# Altium PCB PCB3.PcbDoc
Units mil, origin at the board's own origin, x right, y up, seen from the top; angles counter-clockwise.
Board outline 6000 x 4000 mil, 2 copper layers (Top Layer, Bottom Layer); 46 components, 39 nets, 182 pads, 0 vias.
Unrouted connection lines stored in the file: 71.
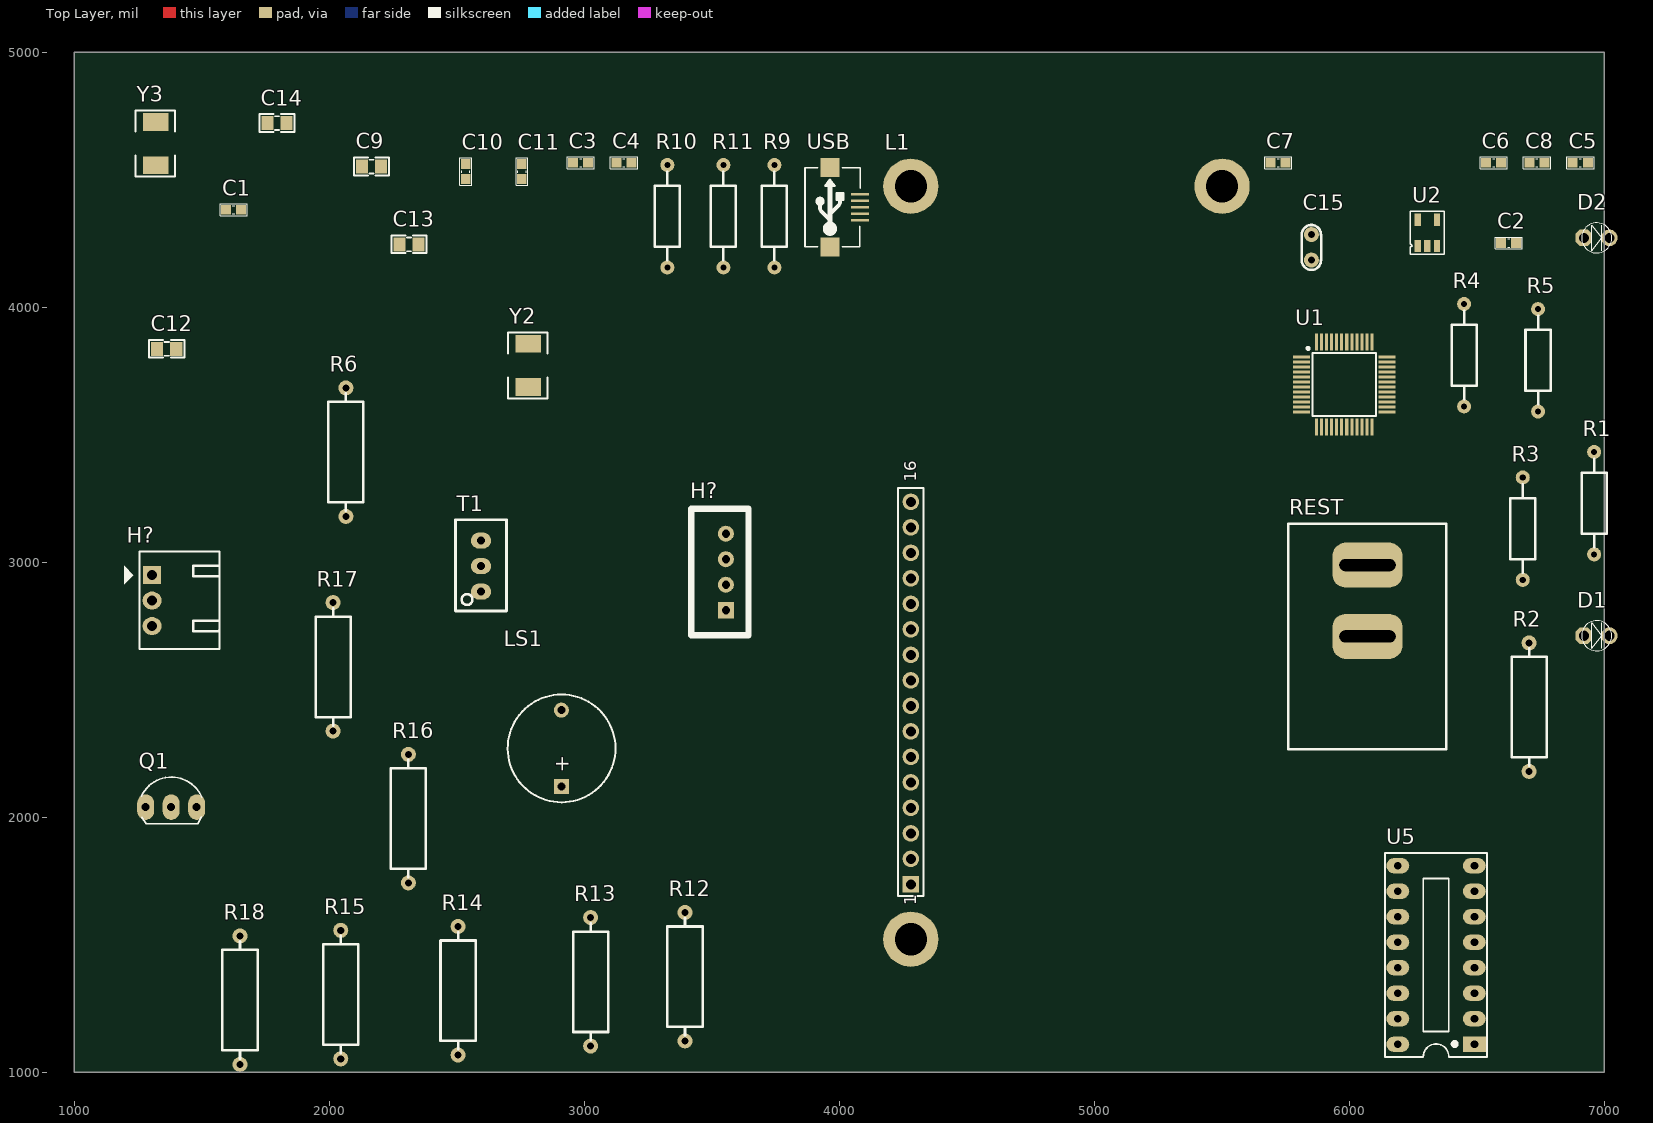
[diagram p0: Top Layer view]
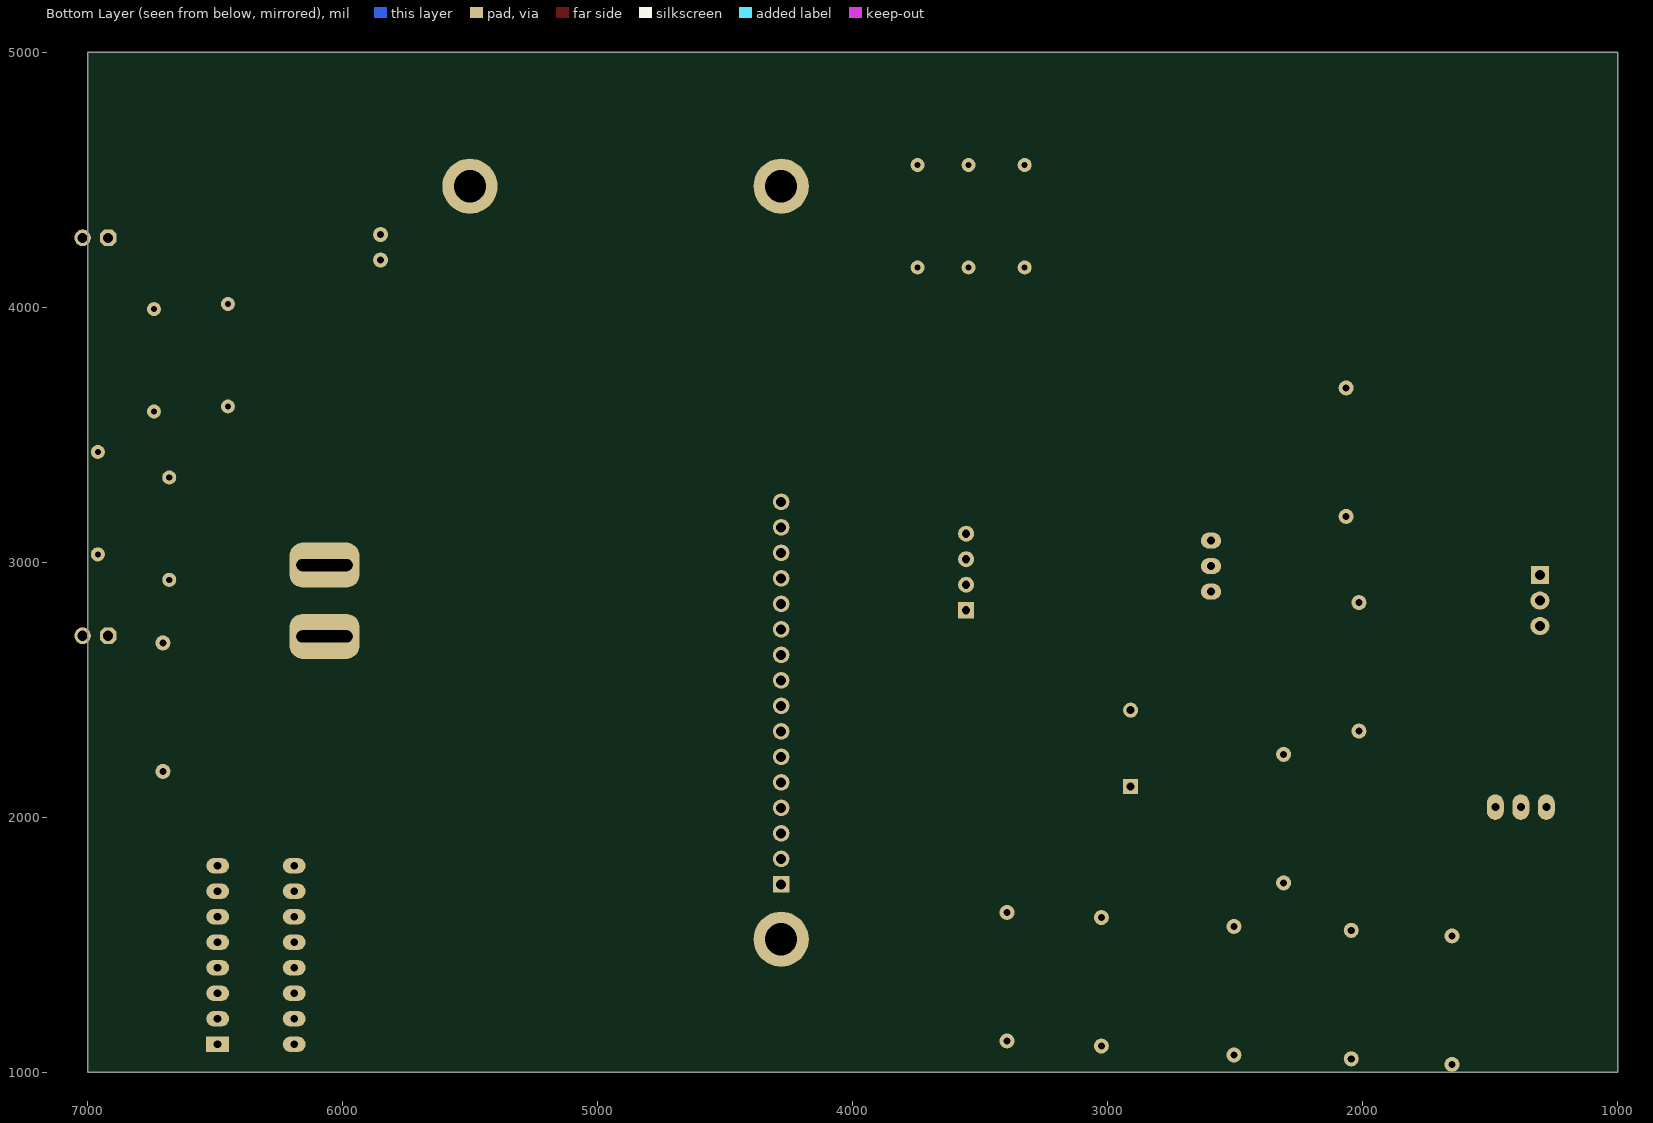
[diagram p1: Bottom Layer view, seen from below]

## Layer stack, top to bottom
Top Solder: solder mask 0.4, Solder Resist, Dk 3.5
Top Layer: signal copper 1.4
Dielectric 1: dielectric 12.6, FR-4, Dk 4.8
Bottom Layer: signal copper 1.4
Bottom Solder: solder mask 0.4, Solder Resist, Dk 3.5

## Board outline
1000,1000 7000,1000 7000,5000 1000,5000

## Design rules (kind name [scope] priority, off if disabled: settings)
Clearance [All] p1: gap=10 ignorepadtopadclearanceinfootprint=FALSE except(0: Arc-Hole Track-Hole SMDPad-Hole THPad-Hole Via-Hole Fill-Hole Poly-Hole Region-Hole Text-Hole)
PolygonConnect [All] p1: connectstyle=Relief reliefconductorwidth=10 reliefentries=4 polygonreliefangle="90 Angle" airgapwidth=10
RoomDefinition Sheet3 [InComponentClass('Sheet3')] p1: confinementstyle=ConfineIn formatcopy=TRUE lockcomponents=FALSE outline 7110,1171.97 10615,1171.97 10615,2091.97 7110,2091.97
RoutingVias [All] p1: holewidth=28 width=50 viastyle="Through Hole" minholewidth=28 minwidth=50 maxholewidth=28 maxwidth=50
SolderMaskExpansion [All] p1: expansion=4 istentingtop=FALSE
Width [All] p1: maxlimit=10 minlimit=10 preferedwidth=10
30 further rules are at their usual default settings.

## Components (designator, comment, footprint, x,y, rotation, side; value= is the part's Value field where it differs from the comment)
C1 "104" "tu 0603" 1624.53,4381.97 r0 top
C2 "105" "tu 0603" 6625,4251.97 r0 top
C3 "104" "tu 0603" 2985.47,4566.97 r0 top
C4 "104" "tu 0603" 3155.47,4566.97 r0 top
C5 "105" "tu 0603" 6905.47,4566.97 r0 top
C6 "106" "tu 0603" 6565.47,4566.97 r0 top
C7 "104" "tu 0603" 5720.47,4566.97 r0 top
C8 "104" "tu 0603" 6735.47,4566.97 r0 top
C9 "20pF" "tu 0805" 2165.47,4551.97 r0 top
C10 "104" "tu 0603" 2535.47,4531.97 r90 top
C11 "104" "tu 0603" 2755.47,4531.97 r90 top
C12 "20pF" "tu 0805" 1362.43,3837.1 r0 top
C13 "20pF" "tu 0805" 2312.43,4247.1 r0 top
C14 "20pF" "tu 0805" 1795,4721.97 r0 top
C15 "223" "tu gom" 5851.26,4235.12 r90 top
D1 "LED 3mm" LED-3MM-RED 6920,2711.97 r0 top
D2 "LED 3mm" LED-3MM-RED 6920,4271.97 r0 top
H? "IR Sensor" "Header 3P DC 2.54" 1305,2950 r0 top
H? "SWD" XH2.54M-4 3555,2811.97 r90 top
L1 "LCD16x2" "LCD16X2_3 HOLES" 4180.47,1421.97 r90 top
LS1 "Coi báo" "Coi Chip Speacker" 2910.5,2120 r90 top
Q1 "C1815" TO92 1380,2040 r0 top value=C9014
R1 "510R" "tro vach 1/4w" 6960,3231.97 r90 top
R2 "10k" "tro vach 1/2w" 6705,2431.97 r90 top
R3 "100k" "tro vach 1/4w" 6680,3131.97 r90 top
R4 "100k" "tro vach 1/4w" 6450,3811.97 r90 top
R5 "510R" "tro vach 1/4w" 6740,3791.97 r90 top
R6 "1M" "tro vach 1/2w" 2065,3431.97 r90 top
R9 "20R" "tro vach 1/4w" 3745.47,4356.97 r90 top
R10 "4.7k" "tro vach 1/4w" 3325.47,4356.97 r90 top
R11 "20R" "tro vach 1/4w" 3545.47,4356.97 r90 top
R12 "10k" "tro vach 1/2w" 3395,1375 r90 top
R13 "10k" "tro vach 1/2w" 3025,1355 r90 top
R14 "10k" "tro vach 1/2w" 2505,1320 r90 top
R15 "10k" "tro vach 1/2w" 2045,1305 r90 top
R16 "10k" "tro vach 1/2w" 2310,1995 r90 top
R17 "330R" "tro vach 1/2w" 2015,2590 r90 top
R18 "4.7k" "tro vach 1/2w" 1650,1283.03 r90 top
REST "" SW_2ARS_TH 6070,2986.97 r0 top
T1 "10K" "Bien Tro Vi Chinh Dung" 2595,2985 r90 top
U1 "STM32F103C8T6" LQFP-48_19.6_393_58X11_SMD 5980,3696.97 r0 top
U2 "RT9193-33GB" SOT23-5 6305.94,4291.97 r0 top
U5 "PCF8574" DIP16 6490,1110 r90 top
USB "USB Micro 5p SMD" "USB Micro 5p SMD" 4080.47,4391.97 r90 top
Y2 "8Mhz" "Thach Anh 2 chan SMD5032" 2780,3771.97 r90 top value=4Mhz
Y3 "32.768K" "Thach Anh 2 chan SMD5032" 1320,4641.97 r90 top value=4Mhz

## Footprints (in the part's own frame and the unit in brackets; to place one, negate y for a bottom-side part, rotate by r counter-clockwise, add the part's x,y. Pads: shape width x height; smd on the part's side, far side on the other; paste and mask are expansions set on the pad)
"Bien Tro Vi Chinh Dung" [mm] "Bien tro vi chinh"
  oval 1.6x2 hole 0.8: 1(-2.54,0) 2(0,0) 3(2.54,0)
  silkscreen extent -4.47,-2.54 4.6,2.54, body extent -4.54,-2.4 4.66,2.4, height 12.02
"Coi Chip Speacker" [mm]
  rect 1.5x1.5 hole 0.8: 1(0,0)
  round 1.5 hole 0.8: 2(7.62,0.013)
  silkscreen extent -1.55,-5.38 9.18,5.36, body extent -2.22,-6 13.24,6, height 4.5
DIP16 [mil] "16 PIN, W 300mil, Pin to pin 100mil"
  rect 60x90 hole 31: 1(0,0)
  oval 60x90 hole 31: 2(100,0) 3(200,0) 4(300,0) 5(400,0) 6(500,0) 7(600,0) 8(700,0) 9(700,300) 10(600,300) 11(500,300) 12(400,300) 13(300,300) 14(200,300) 15(100,300) 16(0,300)
  silkscreen extent -50,-50 750,350, body extent -52,-57 752,356, height 299
"Header 3P DC 2.54" [mil]
  rect 70x70 hole 39.37 unplated: 1(0,0)
  oval 75x70 hole 39.37 unplated: 2(0,-100) 3(0,-200)
  silkscreen extent -110,-290 265,93
"LCD16X2_3 HOLES" [mm] "LCD 16x2"
  rect 1.65x1.65 hole 1: 1(8,-2.54)
  round 1.65 hole 1: 2(10.54,-2.54) 3(13.08,-2.54) 4(15.62,-2.54) 5(18.16,-2.54) 6(20.7,-2.54) 7(23.24,-2.54) 8(25.78,-2.54) 9(28.32,-2.54) 10(30.86,-2.54) 11(33.4,-2.54) 12(35.94,-2.54) 13(38.48,-2.54) 14(41.02,-2.54) 15(43.56,-2.54) 16(46.1,-2.54)
  round 5.5 hole 3.2 paste+0: ""(2.54,-2.54) ""(77.54,-2.54)
  round 5.5 hole 3.2: ""(77.54,-33.54)
  silkscreen extent 6.86,-3.81 47.5,-1.27, body extent 0,-36 80,0, height 17
LED-3MM-RED [mil]
  oct 65x65 hole 40: 1(0,0)
  round 65 hole 40: 2(100,0)
  silkscreen extent -9,-59 109,59, body extent -27,-77 117,80, height 181
LQFP-48_19.6_393_58X11_SMD [mm] "48LQFP"
  rect 1.7x0.3 smd mask+0.076: 1(-4.238,2.75) 2(-4.238,2.25) 3(-4.238,1.75) 4(-4.238,1.25) 5(-4.238,0.75) 6(-4.238,0.25) 7(-4.238,-0.25) 8(-4.238,-0.75) 9(-4.238,-1.25) 10(-4.238,-1.75) 11(-4.238,-2.25) 12(-4.238,-2.75) 25(4.238,-2.75) 26(4.238,-2.25) 27(4.238,-1.75) 28(4.238,-1.25) 29(4.238,-0.75) 30(4.238,-0.25) 31(4.238,0.25) 32(4.238,0.75) 33(4.238,1.25) 34(4.238,1.75) 35(4.238,2.25) 36(4.238,2.75)
  rect 0.3x1.7 smd mask+0.076: 13(-2.75,-4.238) 14(-2.25,-4.238) 15(-1.75,-4.238) 16(-1.25,-4.238) 17(-0.75,-4.238) 18(-0.25,-4.238) 19(0.25,-4.238) 20(0.75,-4.238) 21(1.25,-4.238) 22(1.75,-4.238) 23(2.25,-4.238) 24(2.75,-4.238) 37(2.75,4.238) 38(2.25,4.238) 39(1.75,4.238) 40(1.25,4.238) 41(0.75,4.238) 42(0.25,4.238) 43(-0.25,4.238) 44(-0.75,4.238) 45(-1.25,4.238) 46(-1.75,4.238) 47(-2.25,4.238) 48(-2.75,4.238)
  silkscreen extent -3.72,-3.15 3.15,3.72, body extent -4.5,-4.5 4.5,4.5, height 1.7
SOT23-5 [mm] "CASE: SOT"
  rect 0.62x1.22 smd mask+0.076: 1(-0.953,-1.31) 2(-0.003,-1.31) 3(0.947,-1.31) 4(0.952,1.31) 5(-0.953,1.31)
  silkscreen extent -1.69,-2.14 1.69,2.14, body extent -1.5,-1.5 1.5,1.5, height 1.41
SW_2ARS_TH [mm] "CASE: TH"
  rrect60% 7x4.5 hole 1.2 slot 5.6 at 0 deg mask+0.076: 1(0.025,0.051) 2(0.025,-7.049)
  silkscreen extent -7.87,-18.29 7.87,4.19, body extent -7.47,-17.9 7.53,3.8, height 17.81
"Thach Anh 2 chan SMD5032" [mil] "DO-214-AA/SMB; 2 C-Bend Leads; Body 5.3 x 3.6 mm, inc. leads (LxW)"
  rect 70x100 smd: 1(-85,0) 2(85,0)
  silkscreen extent -130,-75 130,80, body extent -98,-63 98,63, height 51
TO92 [mil] "TO-92"
  oval 66x100 hole 32: 1(-100,0) 2(0,0) 3(100,0)
  silkscreen extent -117,-65 120,118, body extent -109,-66 109,95, height 245
"tro vach 1/2w" [mm]
  round 1.5 hole 0.7: 1(-6.4,0) 2(6.4,0)
  silkscreen extent -5.84,-1.75 5.84,1.75, body extent -6.62,-1.75 6.62,1.75, height 3.5
"tro vach 1/4w" [mm]
  round 1.4 hole 0.6: 1(-5.1,0) 2(5.1,0)
  silkscreen extent -4.39,-1.25 4.42,1.25, body extent -5.38,-1.2 5.38,1.2, height 2.41
"tu 0603" [mm] "Chip Capacitor, 2-Leads, Body 1,60x0,80mm, IPC Medium Density"
  rect 1x0.95 smd mask+0.076: 1(-0.75,0) 2(0.75,0)
  silkscreen extent -1.35,-0.58 1.37,0.58, body extent -0.8,-0.4 0.8,0.4, height 0.9
"tu 0805" [mm] "Compoment SMD 80x50mil"
  rect 1.2x1.4 smd: 1(-0.946,-0.003) 2(0.954,-0.003)
  silkscreen extent -1.75,-0.89 1.75,0.89, body extent -1.01,-0.64 1.01,0.63, height 0.61
"tu gom" [mm] "Tu gom mini"
  round 1.5 hole 0.7: 1(-1.27,0) 2(1.27,0)
  silkscreen extent -2.25,-0.97 2.22,0.97, body extent -2.92,-0.85 2.92,0.85, height 6.12
"USB Micro 5p SMD" [mil]
  rect 10x70 smd: 1(51.18,0) 2(25.59,0) 3(0,0) 4(-25.59,0) 5(-50,0)
  rect 74.8x74.8 smd: 5(-155.51,116.84) 5(155.51,116.84)
  silkscreen extent -155,-1 155,215, body extent -157,5 158,218, height 107
XH2.54M-4 [mm]
  rect 1.6x1.6 hole 0.8: 1(0,0)
  round 1.6 hole 0.8: 2(2.54,0) 3(5.08,0) 4(7.62,0)
  silkscreen extent -2.48,-2.26 10.1,3.46, body extent -2.48,-2.26 10.1,3.48, height 6.91

## Part data
C1 C3 C4 C7 C8 C10 C11: library part "Tu 0603 104 50V 10%", "Dán", Chung_Loai=Dán, Don_Vi=Con, Ma_Hang=MH004568, So_Chan=2, Ten_Linh_Kien="Tụ 0603 104-100nF 10% 50V"
C2 C5: library part "Tu 0603 105 16V 20%", "Dán", Chung_Loai=Dán, Don_Vi=Con, Ma_Hang=MH004574, So_Chan=2, Ten_Linh_Kien="Tụ 0603 105-1uF 20% 16V"
C6: library part "Tu 0603 106 16V 20%", "Dán", Chung_Loai=Dán, Don_Vi=Con, Ma_Hang=MH004848, So_Chan=2, Ten_Linh_Kien="Tụ 0603-10uF 20% 16V"
C9 C12 C13 C14: library part "Tu 0805 20pF 50V 10%", "Dán", Chung_Loai=Dán, Don_Vi=Con, Ma_Hang=MH004558, So_Chan=2, Ten_Linh_Kien="Tụ 0805 20P 10% 50V"
C15: library part "Tu gom 223 50V", "Cắm", Chung_Loai=Cắm, Don_Vi=Con, Ma_Hang=MH007018, So_Chan=2, Ten_Linh_Kien="Tụ gốm 223-22nF 50V"
D1 D2: library part "LED 3mm Do", "Cắm", Chung_Loai=Cắm, Don_Vi=Con, Ma_Hang=MH003892, Ten_Linh_Kien="Led 3MM Phủ Đỏ (10c)"
H?: library part "Header 3P 2.54 Duc Cong", "Cắm", Chung_Loai=Cắm, Don_Vi=Con, Ma_Hang=MH001302, Ten_Linh_Kien="Header 3P XH2.54-3P Đực Cong"
H?: library part "Header 4P 2.54 Duc Thang", "Cắm", Chung_Loai=Cắm, Don_Vi=Con, Ma_Hang=MH001285, Ten_Linh_Kien="Header 4P XH2.54-4P Đực Thẳng"
L1: "Character LCD 16x2"
LS1: library part "Coi Chip Speaker", "Còi chip"
Q1: library part "Trans C1815 DIP", "NPN transistor"
R1 R5: library part "Tro Vach 1/4W 5% 510R", "Cắm", Chung_Loai=Cắm, Don_Vi=Con, Ma_Hang=MH007325, So_Chan=2, Ten_Linh_Kien="Trở Vạch 1/4w 5% 510R"
R2 R12 R13 R14 R15 R16: library part "Tro Vach 1/2W 5% 10k", "Cắm", Chung_Loai=Cắm, Don_Vi=Con, Ma_Hang=MH006206, So_Chan=2, Ten_Linh_Kien="Trở 5% 1/2w 10k"
R3 R4: library part "Tro Vach 1/4W 5% 100k", "Cắm", Chung_Loai=Cắm, Don_Vi=Con, Ma_Hang=MH007352, So_Chan=2, Ten_Linh_Kien="Trở Vạch 1/4w 5% 100k"
R6: library part "Tro Vach 1/2W 5% 1M", "Cắm", Chung_Loai=Cắm, Don_Vi=Con, Ma_Hang=MH007242, So_Chan=2, Ten_Linh_Kien="Trở 5% 1/2w 1M"
R9 R11: library part "Tro Vach 1/4W 5% 20R", "Cắm", Chung_Loai=Cắm, Don_Vi=Con, Ma_Hang=MH007298, So_Chan=2, Ten_Linh_Kien="Trở Vạch 1/4w 5% 20R"
R10: library part "Tro Vach 1/4W 1% 4.7k", "Cắm", Chung_Loai=Cắm, Don_Vi=Con, Ma_Hang=MH006350, So_Chan=2, Ten_Linh_Kien="Trở Vạch 1/4w 1% 4.7k"
R17: library part "Tro Vach 1/2W 5% 330R", "Cắm", Chung_Loai=Cắm, Don_Vi=Con, Ma_Hang=MH006204, So_Chan=2, Ten_Linh_Kien="Trở 5% 1/2w 330R"
R18: library part "Tro Vach 1/2W 5% 4.7k", "Cắm", Chung_Loai=Cắm, Don_Vi=Con, Ma_Hang=MH006198, So_Chan=2, Ten_Linh_Kien="Trở 5% 1/2w 4.7k"
REST: library part SW1_10A-SRB23A2BBBNN-TH, "Rocker Switch SPDT 10A (AC) 125V Panel Mount, Snap-In", Alternate Part Number-1=NA, Case/Package=TH, Manufacturer="ITT C&K", Manufacturer Part Number=SRB23A2BBBNN, Supplier Part Number-1=SRB23A2BBBNN, Supplier-1="SP ROAD"
T1: library part "Bien Tro Tinh Chinh 10K Dung", "Cắm", Chung_Loai=Cắm, Don_Vi=Con, Ma_Hang=MH003232, Ten_Linh_Kien="Biến Trở VR 103-10K 3296W"
U1: library part IC_STM32F103C8T6, "ARM® Cortex®-M3 STM32F1 Microcontroller IC 32-Bit 72MHz 64KB (64K x 8) FLASH 48-LQFP (7x7)", Alternate Part Number-1=NA, Case/Package=LQFP48, Manufacturer=STMicroelectronics, Manufacturer Part Number=STM32F103C8T6, Supplier Part Number-1=STM32F103C8T6, Supplier-1=LCSC
U2: library part REG_5.5V-3.3V-0.3A-1W-SOT-23-5, "Linear Voltage Regulator IC 1 Output 300mA SOT-23-5", Alternate Part Number-1=NA, Case/Package=SOT-23-5, Manufacturer="Richtek USA Inc.", Supplier Part Number-1=C15651, Manufacturer Part Number=RT9193-33GB, Supplier-1=LCSC
U5: "I2C PORT EXPANDER", Frequency - Clock=100KHz, Manufacturer="NXP Semiconductors", Manufacturer Part Number=PCF8574T/3,512, Operating Temperature="-40°C ~ 85°C", Package / Case="16-SOIC (7.5mm Width)", Supplier Part Number=568-1076-5-ND, Voltage - Supply="2.5 V ~ 6 V", Category="Integrated Circuits (ICs)", Includes=POR, Interface=I²C, Interrupt Output=Yes, Number of I /O=8, Packaging=Tube, RoHS="RoHS Compliant", Supplier=Digi-Key, Supplier 1=Digi-Key, Supplier Part Number 1=568-1076-5-ND
USB: "USB Type B", Ma_Hang=MH001020, Ten="MicroUSB MK5P SMD"
Y2 Y3: library part "Thach Anh 2 chan SMD 5032", "Crystal For all Crystal 2pin."

## Nets (pads, with @x,y where several pads share a name; then routed paths per layer and width w, separated by ;. In a path a pad name is that pad's centre, name@x,y a point inside that pad or via, vN(x,y) a via of type N, cw(c..) or ccw(c..) an arc to the next point about the centre after c; other vN are vias at no path point)
5V: C5.1 C7.1 H?.1@1305,2950 R10.1 U2.1 U2.3 USB.1
BOOT1: R4.2
D0: C2.2 C3.2 C4.2 C5.2 C6.2 C7.2 C8.2 C9.2 C10.2 C11.2 C12.2 C15.2 H?.2@1305,2850 Q1.1 R1.2 REST.1 T1.3 U2.2 U5.8 USB.4 USB.5
D4: U5.9
D5: U5.10
D6: U5.11
D7: U5.12
E: U5.6
LED+: R17.1
NetC12_1: C12.1 Y3.1
NetC13_2: C13.2 C14.2
NetC14_1: C14.1 R6.1 Y2.1
NetC15_1: C15.1 U2.4
NetD1_2: D1.2 R1.1
NetD2_2: D2.2 R5.1
NetLS1_2: LS1.2 Q1.2
NetQ1_3: Q1.3 R18.2
NetR9_1: R9.1 USB.2
NetR11_1: R11.1 USB.3
NetR12_1: R12.1 U5.1
NetR13_1: R13.1 U5.2
NetR14_1: R14.1 U5.3
OSCIN: C13.1 R6.2 Y2.2
OUT: H?.3@1305,2750
PA1: R18.1
PA11: R9.2
PA12: R10.2 R11.2
PB6: R15.1 U5.14
PB7: R16.1 U5.15
PC13: R5.2
PC14: C9.1 Y3.2
R/W: U5.5
RESET: C2.1 R2.1 REST.2
RS: U5.4
SWD: C1.2 H?.4
SWDCLK: H?.3@3555,3011.97
SWDIO: H?.2@3555,2911.97
VCC3V3: C1.1 C3.1 C4.1 C6.1 C8.1 C10.1 C11.1 D1.1 D2.1 H?.1@3555,2811.97 LS1.1 R2.2 R12.2 R13.2 R14.2 R15.2 R16.2 R17.2 T1.1 U2.5 U5.16
VEE: T1.2
pads on no net: L1. L1.1 L1.2 L1.3 L1.4 L1.5 L1.6 L1.7 L1.8 L1.9 L1.10 L1.11 L1.12 L1.13 L1.14 L1.15 L1.16 R3.1 R3.2 R4.1 U1.1 U1.2 U1.3 U1.4 U1.5 U1.6 U1.7 U1.8 U1.9 U1.10 U1.11 U1.12 U1.13 U1.14 U1.15 U1.16 U1.17 U1.18 U1.19 U1.20 U1.21 U1.22 U1.23 U1.24 U1.25 U1.26 U1.27 U1.28 U1.29 U1.30 U1.31 U1.32 U1.33 U1.34 U1.35 U1.36 U1.37 U1.38 U1.39 U1.40 U1.41 U1.42 U1.43 U1.44 U1.45 U1.46 U1.47 U1.48 U5.7 U5.13

## Text inside footprints (layer, text, board x,y; h text height)
L1: Top Overlay "1" at 4302.52,1654.25 h47.24 r90; Top Overlay "16" at 4302.52,3315.67 h47.24 r90
LS1: Top Overlay "+" at 2938.5,2175.5 h60 r90